# Altium PCB Leiterplatte.PcbDoc
Units mil, origin at the board's own origin, x right, y up, seen from the top; angles counter-clockwise.
Board outline 4527.56 x 2047.24 mil, 2 copper layers (Top Layer, Bottom Layer); 27 components, 26 nets, 174 pads, 445 vias.
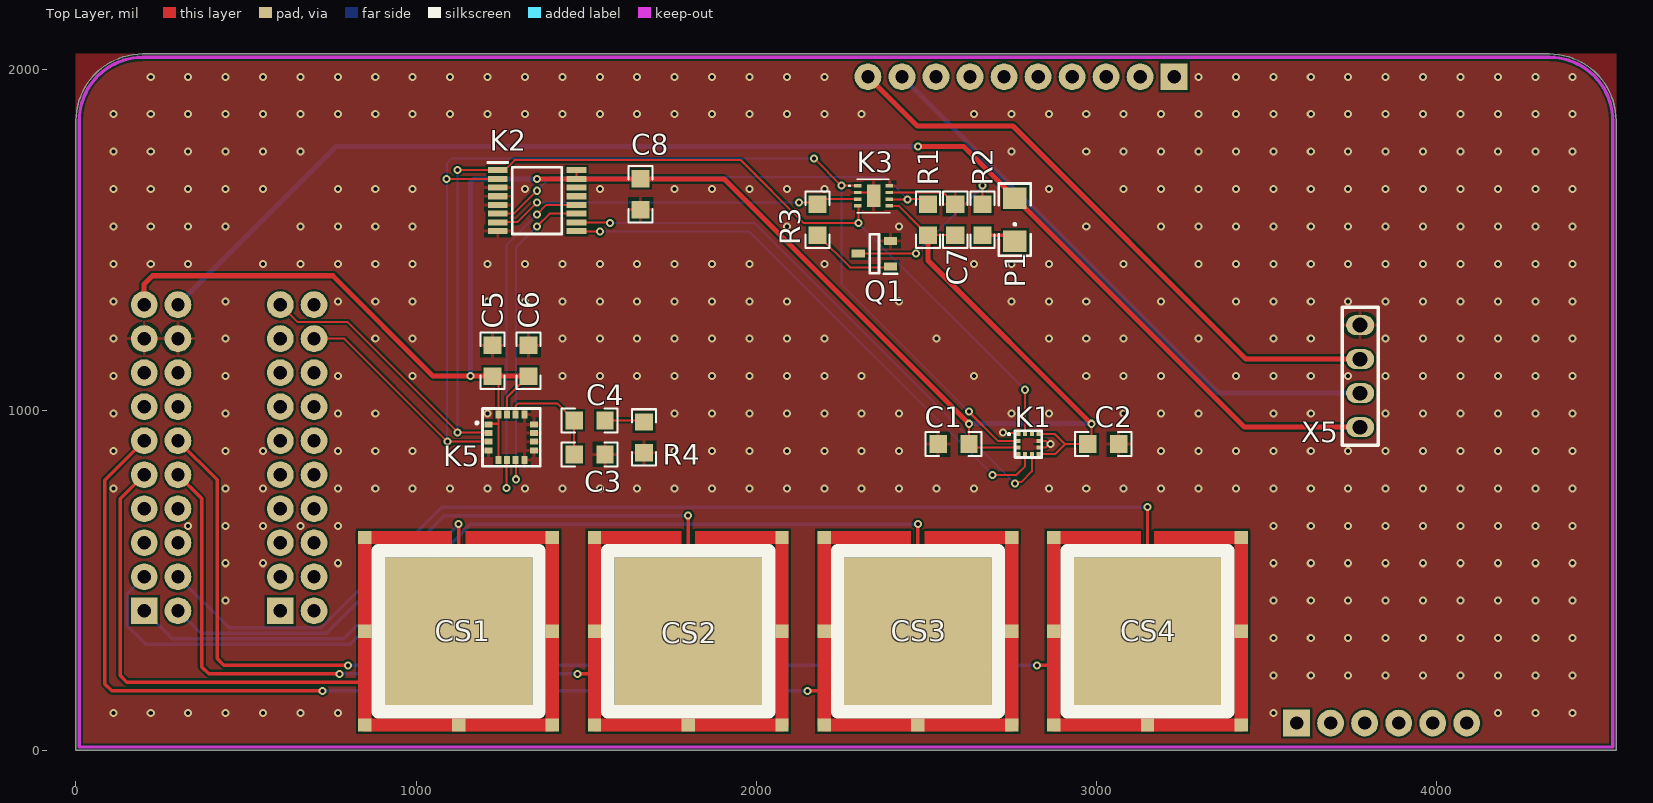
[diagram p0: Top Layer view]
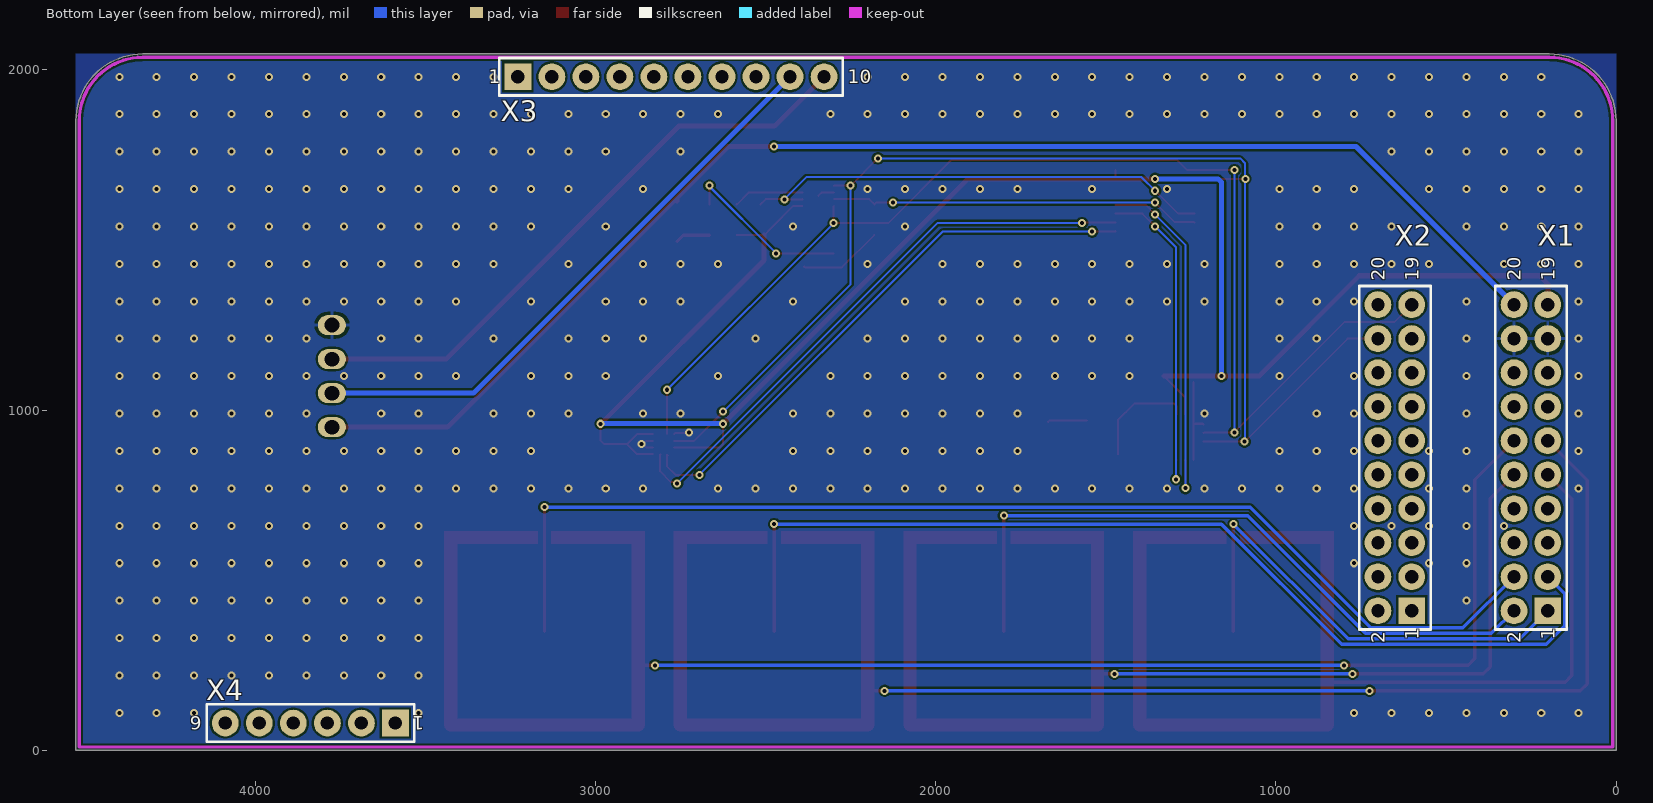
[diagram p1: Bottom Layer view, seen from below]

## Layer stack, top to bottom
Top Solder: solder mask 0.4, Solder Resist, Dk 3.5
Top Layer: signal copper 1.4
Dielectric 1: dielectric 12.6, FR-4, Dk 4.8
Bottom Layer: signal copper 1.4
Bottom Solder: solder mask 0.4, Solder Resist, Dk 3.5

## Board outline
0,0 0,1850.39 cw(c196.85,1850.39) 196.85,2047.24 4330.71,2047.24 cw(c4330.71,1850.39) 4527.56,1850.39 4527.56,0

## Design rules (kind name [scope] priority, off if disabled: settings)
AcuteAngle [All] p1: minimum=9.00000000000000E+0001 checktracksonly=TRUE
Clearance [All] p1: gap=6 ignorepadtopadclearanceinfootprint=TRUE
ComponentClearance [All] p1: gap=0 collisioncheckmode=3 verticalgap=0 showdistances=FALSE
HoleSize [All] p1: absolutevalues=TRUE maxlimit=100 minlimit=11.81 maxpercent=80.000 minpercent=20.000
MinimumAnnularRing [All] p1: minimumring=5.91
PlaneConnect [All] p1: planeconnectstyle=Direct reliefexpansion=20 reliefentries=4 reliefconductorwidth=10 reliefairgap=10
PolygonConnect [All] p1: thpad.connectstyle=Relief thpad.reliefconductorwidth=10 thpad.reliefentries=4 thpad.polygonreliefangle="90 Angle" thpad.airgapwidth=10 smdpad.connectstyle=Relief smdpad.reliefconductorwidth=10 smdpad.reliefentries=4 smdpad.polygonreliefangle="90 Angle" smdpad.airgapwidth=10 via.connectstyle=Direct via.reliefconductorwidth=10 via.reliefentries=4 via.polygonreliefangle="90 Angle" via.airgapwidth=10
RoomDefinition Schema [InComponentClass('Schema')] p1: confinementstyle=ConfineIn formatcopy=TRUE lockcomponents=FALSE outline 0,0 2000,0 2000,1000 0,1000
RoutingTopology [All] p1: topology=Daisy_MidDriven
RoutingVias [All] p1: holewidth=11.81 width=23.62 viastyle="Through Hole" minholewidth=11.81 minwidth=23.62 maxholewidth=11.81 maxwidth=23.62
SMDEntry [All] p1: side=TRUE corner=TRUE anyangle=TRUE
SilkToSolderMaskClearance [IsPad] p1: minsilkscreentomaskgap=7 clearancetoexposedcopper=TRUE
SolderMaskExpansion SolderMaskExpansion_1 [IsVia] p1: expansion=-393.7 istentingtop=FALSE
SolderMaskExpansion [All] p2: expansion=4 istentingtop=FALSE
UnRoutedNet [All] p1: checkbadconnections=TRUE
ViasUnderSMD [All] p1: allowed=FALSE
Width Power [InNetClass('Power')] p1: maxlimit=20 minlimit=6 preferedwidth=15
Width Signal [All] p2: maxlimit=15 minlimit=6 preferedwidth=10
24 further rules are at their usual default settings.

## Classes and differential pairs
net class Power: 3.3V 5V GND

## Components (designator, comment, footprint, x,y, rotation, side; value= is the part's Value field where it differs from the comment)
C1 "Capacitor" "CAP CER 0805 H" 2580,900 r0 top value=100nF
C2 "Capacitor" "CAP CER 0805 H" 3020,900 r0 top value=100nF
C3 "Capacitor" "CAP CER 0805 H" 1510,870 r0 top value=10nF
C4 "Capacitor" "CAP CER 0805 H" 1510,970 r0 top value=470nF
C5 "Capacitor" "CAP CER 0805 H" 1225,1145.28 r90 top value=100nF
C6 "Capacitor" "CAP CER 0805 H" 1330,1145.28 r90 top value=10uF
C7 "Capacitor" "CAP CER 0805 H" 2585,1560 r90 top value=100nF
C8 "Capacitor" "CAP CER 0805 H" 1660,1635 r90 top value=100nF
CS1 "Touch Button" "BUTTON SELF RECTANGLE" 1125,350 r0 top
CS2 "Touch Button" "BUTTON SELF RECTANGLE" 1800,350 r0 top
CS3 "Touch Button" "BUTTON SELF RECTANGLE" 2475,350 r0 top
CS4 "Touch Button" "BUTTON SELF RECTANGLE" 3150,350 r0 top
K1 "BMA423" BMA423 2800,900 r270 top
K2 "PCA9557PW,118" SOP65P640X110-16N 1355.67,1616.02 r0 top
K3 "SHT30-DIS-B2.5KS" SHT30DISB25KS 2345,1630 r0 top
K5 "I3G4250DTR" LGA-16L(4X4X1.1MM) 1280,920 r0 top
P1 "red ALERT" "LED 1206 red H" 2760,1560 r90 top
Q1 "MOSFET N-Channel" SOT96P237X111-3N 2347.24,1460 r180 top
R1 "Resistor" "RES 0805 H" 2505,1560 r270 top value=10k
R2 "Resistor" "RES 0805 H" 2665,1559.72 r270 top value=150
R3 "Resistor" "RES 0805 H" 2180,1560 r270 top value=100
R4 "Resistor" "RES 0805 H" 1670,920 r270 top value=10k
X1 "I/O Header" "Header THT male 2x10" 250,860.24 r90 bottom
X2 "FPGA Header" "Header THT male 2x10" 650,860.24 r90 bottom
X3 "Arduino IOH" "Header THT male 1x10" 2778.35,1980.24 r180 bottom locked
X4 "Arduino AD" "Header THT male 1x6" 3838.35,80.24 r0 bottom locked
X5 "HC-SR04" HC-SR04 3775,950 r90 top locked

## Footprints (in the part's own frame and the unit in brackets; to place one, negate y for a bottom-side part, rotate by r counter-clockwise, add the part's x,y. Pads: shape width x height; smd on the part's side, far side on the other; paste and mask are expansions set on the pad)
BMA423 [mm]
  rect 0.3x0.35 smd: 1(-0.75,-0.775) 2(-0.25,-0.775) 3(0.25,-0.775) 4(0.75,-0.775) 7(0.75,0.775) 8(0.25,0.775) 9(-0.25,0.775) 10(-0.75,0.775)
  rect 0.35x0.3 smd: 5(0.775,-0.25) 6(0.775,0.25) 11(-0.775,0.25) 12(-0.775,-0.25)
  silkscreen extent -1,-1.5 1,1, body extent -1,-1 1,1, height 1.1
"BUTTON SELF RECTANGLE" [mm]
  rect 1x1 smd paste-12 mask-12: DS(-7,-7) DS(-7,0) DS(-7,7) DS(0,-7) DS(7,-7) DS(7,0) DS(7,7)
  rect 11x11 smd paste-12 mask-12: y1(0,0)
  Top Layer region: 0.5,6.5 7.5,6.5 7.5,7.5 0.5,7.5
  Top Layer region: -7.5,6.5 -0.5,6.5 -0.5,7.5 -7.5,7.5
  Top Layer lines w1: -7,7 -7,0 -7,-3.81 -7,-7 0,-7 7,-7 7,0 7,7
  silkscreen extent -6,-6 6,6
"CAP CER 0805 H" [mm] "0805 ceramic capacitor for hand soldering"
  rect 1.3x1.35 smd: 1(-1.15,0) 2(1.15,0)
  silkscreen extent -2.1,-0.9 2.1,0.9, body extent -1,-0.62 1,0.63, height 0.8
HC-SR04 [mm]
  oval 1.5x2.1 hole 1.1: 1(0,0) 2(2.54,0) 3(5.08,0) 4(7.62,0)
  silkscreen extent -1.35,-1.35 8.95,1.33, body extent -19.07,-17.45 26.38,1.24, height 24.5
"Header THT male 1x6" [mm] "header for tht mounting / pitch = 2.54mm"
  rect 2x2 hole 1: 1(-6.35,0)
  round 2 hole 1: 2(-3.81,0) 3(-1.27,0) 4(1.27,0) 5(3.81,0) 6(6.35,0)
  silkscreen extent -7.75,-1.4 7.75,1.4, body extent -7.62,-1.24 7.62,1.25, height 8.54
"Header THT male 1x10" [mm] "header for tht mounting / pitch = 2.54mm"
  rect 2x2 hole 1: 1(-11.43,0)
  round 2 hole 1: 2(-8.89,0) 3(-6.35,0) 4(-3.81,0) 5(-1.27,0) 6(1.27,0) 7(3.81,0) 8(6.35,0) 9(8.89,0) 10(11.43,0)
  silkscreen extent -12.83,-1.4 12.83,1.4, body extent -12.7,-1.25 12.7,1.24, height 8.54
"Header THT male 2x10" [mm] "header for tht mounting / pitch = 2.54mm"
  rect 2x2 hole 1: 1(-11.43,-1.245)
  round 2 hole 1: 2(-11.43,1.27) 3(-8.89,-1.245) 4(-8.89,1.27) 5(-6.35,-1.245) 6(-6.35,1.27) 7(-3.81,-1.245) 8(-3.81,1.27) 9(-1.27,-1.245) 10(-1.27,1.27) 11(1.27,-1.245) 12(1.27,1.27) 13(3.81,-1.245) 14(3.81,1.27) 15(6.35,-1.245) 16(6.35,1.27) 17(8.89,-1.245) 18(8.89,1.27) 19(11.43,-1.245) 20(11.43,1.27)
  silkscreen extent -12.83,-2.67 12.83,2.67, body extent -12.7,-2.51 12.7,2.47, height 8.54
"LED 1206 red H" [mm] "SMD LED"
  rect 1.6x1.75 smd: A(1.6,0) C(-1.6,0)
  silkscreen extent -2.7,-1.2 2.7,1.2, body extent -1.6,-0.8 1.6,0.8, height 1.1
LGA-16L(4X4X1.1MM) [mm]
  rect 0.6x0.45 smd: 1(-1.7,0.975) 2(-1.7,0.325) 3(-1.7,-0.325) 4(-1.7,-0.975) 9(1.7,-0.975) 10(1.7,-0.325) 11(1.7,0.325) 12(1.7,0.975)
  rect 0.45x0.6 smd: 5(-0.975,-1.7) 6(-0.325,-1.7) 7(0.325,-1.7) 8(0.975,-1.7) 13(0.975,1.7) 14(0.325,1.7) 15(-0.325,1.7) 16(-0.975,1.7)
  silkscreen extent -2.66,-2.16 2.16,2.16
"RES 0805 H" [mm] "0805 resistor for hand soldering"
  rect 1.3x1.35 smd: 1(-1.15,0) 2(1.15,0)
  silkscreen extent -2.1,-0.9 2.1,0.9, body extent -1.15,-0.67 1.15,0.68, height 0.76
SHT30DISB25KS [mm]
  rect 0.55x0.25 smd: 1(-1.175,0.75) 2(-1.175,0.25) 3(-1.175,-0.25) 4(-1.175,-0.75) 5(1.175,-0.75) 6(1.175,-0.25) 7(1.175,0.25) 8(1.175,0.75)
  rect 1x1.7 smd: 9(0,0)
  silkscreen extent -1.85,-1.25 1.25,1.25, body extent -1.25,-1.25 1.25,1.25, height 1.1
SOP65P640X110-16N [mm]
  rect 1.475x0.45 smd: 1(-2.938,2.275) 2(-2.938,1.625) 3(-2.938,0.975) 4(-2.938,0.325) 5(-2.938,-0.325) 6(-2.938,-0.975) 7(-2.938,-1.625) 8(-2.938,-2.275) 9(2.938,-2.275) 10(2.938,-1.625) 11(2.938,-0.975) 12(2.938,-0.325) 13(2.938,0.325) 14(2.938,0.975) 15(2.938,1.625) 16(2.938,2.275)
  silkscreen extent -3.67,-2.5 1.85,2.85, body extent -3.2,-2.5 3.2,2.5, height 1.1
SOT96P237X111-3N [mm]
  rect 1x0.6 smd: 1(-1.2,0.955) 2(-1.2,-0.955) 3(1.2,0)
  silkscreen extent -1.7,-1.46 0.35,1.51, body extent -1.18,-1.46 1.18,1.46, height 1.11

## Part data
C1 C2 C3 C4 C5 C6 C7 C8: "Non polarized capacitor", LatestRevisionDate=01.04.2019, Publisher="ICT Berufsbildungscenter AG"
CS1 CS2 CS3 CS4: "Rechteckige Kupferfläche"
K1: library part Beschleunigungsmesser, "Beschleunigungsmesser Triaxial low-g 12bit Acceleration Sensor", Supplier Part Number 1=262-BMA423, ComponentLink1Description="New link", ComponentLink1URL=https://www.mouser.ch/ProductDetail/Bosch-Sensortec/BMA423/?qs=HXFqYaX1Q2xC%252BSgeGoX3mg%3D%3D, Supplier 1=Mouser
K2: library part "Port Expander", "Schnittstelle - I/O-Erweiterer OCT SMBUS/I2C INTRFC", Supplier Part Number 1=771-PCA9557PW-T, ComponentLink1Description="New link", ComponentLink1URL=https://www.mouser.ch/ProductDetail/NXP-Semiconductors/PCA9557PW118?qs=LOCUfHb8d9vFRJDeZaj93A%3D%3D, Supplier 1=Mouser
K3: library part "Humidity & Temp. Sensor", "Feuchtigkeitssensoren für Plattenmontage RH Accuracy +/- 3% Digital, DFN Type", Supplier Part Number 1=403-SHT30-DIS-B, ComponentLink1Description="New link", ComponentLink1URL=https://www.mouser.ch/ProductDetail/Sensirion/SHT30-DIS-B25kS?qs=y6ZabgHbY%252BwVK7712NFj8g==, Supplier 1=Mouser
K5: library part Gyroskop, "Gyroskope AUTO & INDUSTRIAL SENSORS", Supplier Part Number 1=511-I3G4250DTR, ComponentLink1Description="New link", ComponentLink1URL=https://www.mouser.ch/ProductDetail/STMicroelectronics/I3G4250DTR/?qs=%2Fha2pyFadugIiSRyLsysBNkcELyrugzinfnj1%2FprSe9QiJpXEwggKQ%3D%3D, Supplier 1=Mouser
P1: library part LED, "Light emitting diode", LatestRevisionDate=03.04.2019, Publisher="ICT Berufsbildungscenter AG"
X1 X2 X3 X4: "board to board header", LatestRevisionDate=02.05.2019, Publisher="ICT Berufsbildungscenter AG"
X5: library part Ultraschall-Distanzsensor, "Buchsenanschluss für den Sensor", Supplier Part Number 1=375-HC-SR04, ComponentLink1Description="New link", ComponentLink1URL=https://www.mouser.ch/ProductDetail/OSEPP-Electronics/HC-SR04/?qs=%2Fha2pyFaduh4%252Bb8VhcwOUSciFhLRlhNOu8G0etmXCiZdsBFkrSGdCA%3D%3D, Supplier 1=Mouser
R1 R2 R3 R4: LatestRevisionDate=02.04.2019, Publisher="ICT Berufsbildungscenter AG"

## Via types
v1: diameter 23.62, hole 11.81, Top Layer to Bottom Layer, 445 vias

## Nets (pads, with @x,y where several pads share a name; then routed paths per layer and width w, separated by ;. In a path a pad name is that pad's centre, name@x,y a point inside that pad or via, vN(x,y) a via of type N, cw(c..) or ccw(c..) an arc to the next point about the centre after c; other vN are vias at no path point)
3.3V: C1.2 C2.1 C5.1 C6.1 C7.1 C8.2 K1.3 K1.7 K1.10 K2.15 K2.16 K3.5 K5.1 K5.5 K5.15 K5.16 R1.2 X1.19 | length 5945.8
  Top Layer w6: K5.1 1214.69,960 1241.61,960 ; K5.5 1241.61,960 ; C5.1@1241.61,1083.39 K5.16 1241.61,960 ; K5.15 1267.2,1038.19 1329.02,1100 C6.1 ; K2.15 K2.16 ; K3.5 2418.27,1600.47 2481.43,1537.32 2504.02,1514.72 R1.2 C7.1 ; v1(2625,960) 2625,900.28 C1.2 2635.12,890.16 K1.3 ; K1.7 2878.11,870.47 2907.64,900 ; K1.10 2878.11,929.53 2907.64,900 ; v1(2985,960) 2985,910.28 C2.1 2907.64,900
  Top Layer w15: X1.19 200,1311.23 200,1370 225,1395 755,1395 1050,1100 v1(1160,1100) C5.1 C6.1@1329.02,1100 ; v1(1355,1680) K2.15 C8.2@1659.72,1680 ; C8.2 C8.2@1659.72,1680 ; R1.2 2505,1440 v1(2985,960) ; v1(2625,960) 1905,1680 C8.2@1659.72,1680
  Bottom Layer w15: v1(1160,1100) 1160,1670 1170,1680 v1(1355,1680) ; v1(2625,960) 2625.31,960.31 2984.69,960.31 v1(2985,960)
5V: P1.A X1.20 X5.1 | length 4011.6
  Top Layer w15: v1(2475,1775) 2610,1775 P1.A@2761,1624 ; P1.A@2760,1615 P1.A ; P1.A@2765,1620 3435,950 X5.1
  Bottom Layer w15: X1.20 764.76,1775 v1(2475,1775)
BMA_INT1: K1.5 K2.9 | length 1661.5
  Top Layer w6: K2.9 1472.07,1525.73 1539.27,1525.73 v1(1540,1525) ; v1(2695,810) 2765,810 2790.16,835.16 K1.5@2790.16,866.58 ; K1.5@2787.25,866.58 K1.5
  Bottom Layer w6: v1(1540,1525) 1980,1525 v1(2695,810)
BMA_INT2: K1.6 K2.10 | length 1720.4
  Top Layer w6: K2.10 1472.36,1551.02 1568.98,1551.02 v1(1570,1550) ; v1(2760,785) 2763.37,788.37 2778.37,788.37 2810,820 2810,869.33 K1.6
  Bottom Layer w6: v1(1570,1550) 1995,1550 v1(2760,785)
CS1: CS1.y1 X1.1 | length 1412.8
  Top Layer w10: CS1.y1 v1(1125,665)
  Bottom Layer w10: X1.1 283.36,327.87 787.87,327.87 v1(1125,665)
CS2: CS2.y1 X1.2 | length 2010.9
  Top Layer w10: CS2.y1 v1(1800,690)
  Bottom Layer w10: X1.2 366.37,343.87 736.61,343.87 1082.74,690 v1(1800,690)
CS3: CS3.y1 X1.3 | length 2973
  Top Layer w10: CS3.y1 v1(2475,665)
  Bottom Layer w10: X1.3 150.62,459.87 150.62,366.31 205.07,311.87 806.87,311.87 1160,665 v1(2475,665)
CS4: CS4.y1 X1.4 | length 3424.4
  Top Layer w10: CS4.y1 v1(3150,715)
  Bottom Layer w10: X1.4 450.37,359.87 720.86,359.87 1076,715 v1(3150,715)
DS1: CS1.DS X1.9 | length 1347.3
  Top Layer w10: X1.9 130,739.24 130,220 150,200 849.41,200
DS2: CS2.DS X1.10 | length 1756.9
  Top Layer w10: X1.10 370,740.24 370,245 390,225 v1(775,225) ; v1(1475,225) 1524.41,225
  Bottom Layer w10: v1(775,225) v1(1475,225)
DS3: CS3.DS X1.11 | length 2886
  Top Layer w10: X1.11 85,794.24 85,195 105,175 v1(725,175) ; v1(2150,175) 2199.41,175
  Bottom Layer w10: v1(725,175) v1(2150,175)
DS4: CS4.DS X1.12 | length 3155.6
  Top Layer w10: X1.12 415,795.24 415,270 435,250 v1(800,250) ; v1(2825,250) 2874.41,250
  Bottom Layer w10: v1(800,250) v1(2825,250)
GND: C1.1 C2.2 C3.2 C5.2 C6.2 C7.2 C8.1 K1.1 K1.8 K1.9 K2.3 K2.4 K2.5 K2.8 K3.2 K3.7 K3.8 K3.9 K5.4 K5.8 K5.9 K5.10 K5.11 K5.12 K5.13 Q1.2 R4.2 X1.17 X1.18 X5.4 | length 377.5
  Top Layer w6: K3.2 2335.16,1639.84 K3.9 ; K3.7 2474.67,1639.84 ; 2474.7,1639.87 2535.3,1639.87 ; 2535.33,1639.84 2549.45,1639.84 2584.02,1605.28 C7.2 ; v1(2725,935) 2727.74,932.26 2766.75,932.26 K1.1 ; K1.8 2850.39,890.16 v1@2860.23,900 ; K1.9 2850.39,909.84 v1@2860.23,900 ; v1(2865,900) v1@2860.23,900
  other v1: 110,110 220,110 330,110 440,110 550,110 660,110 770,110 3520,110 4180,110 4290,110 4400,110 3520,220 3630,220 3740,220 3850,220 3960,220 4070,220 4180,220 4290,220 4400,220 3520,330 3630,330 3740,330 3850,330 3960,330 4070,330 4180,330 4290,330 4400,330 440,440 3520,440 3630,440 3740,440 3850,440 3960,440 4070,440 4180,440 4290,440 4400,440 440,550 550,550 770,550 3520,550 3630,550 3740,550 3850,550 3960,550 4070,550 4180,550 4290,550 4400,550 330,660 440,660 550,660 660,660 770,660 3520,660 3630,660 3740,660 3850,660 3960,660 4070,660 4180,660 4290,660 4400,660 110,770 440,770 550,770 770,770 880,770 990,770 1100,770 1210,770 1320,770 1430,770 1540,770 1650,770 1760,770 1870,770 1980,770 2090,770 2200,770 2310,770 2420,770 2530,770 2640,770 2860,770 2970,770 3080,770 3190,770 3300,770 3410,770 3520,770 3630,770 3740,770 3850,770 3960,770 4070,770 4180,770 4290,770 4400,770 110,880 440,880 550,880 770,880 880,880 990,880 1760,880 1870,880 1980,880 2090,880 2200,880 2310,880 2420,880 3190,880 3300,880 3410,880 3520,880 3630,880 3740,880 3850,880 3960,880 4070,880 4180,880 4290,880 4400,880 110,990 440,990 770,990 880,990 1210,990 1760,990 1870,990 1980,990 2090,990 2200,990 2310,990 2420,990 2750,990 2860,990 3080,990 3190,990 3300,990 3520,990 3630,990 3850,990 3960,990 4070,990 4180,990 4290,990 4400,990 110,1100 440,1100 770,1100 990,1100 1430,1100 1540,1100 1650,1100 1760,1100 1870,1100 1980,1100 2090,1100 2200,1100 2310,1100 2640,1100 2970,1100 3080,1100 3190,1100 3410,1100 3520,1100 3630,1100 3740,1100 3850,1100 3960,1100 4070,1100 4180,1100 4290,1100 4400,1100 110,1210 440,1210 880,1210 990,1210 1430,1210 1540,1210 1650,1210 1760,1210 1870,1210 1980,1210 2090,1210 2200,1210 2530,1210 2860,1210 2970,1210 3080,1210 3300,1210 3520,1210 3630,1210 3850,1210 3960,1210 4070,1210 4180,1210 4290,1210 4400,1210 110,1320 440,1320 770,1320 880,1320 990,1320 1210,1320 1320,1320 1430,1320 1540,1320 1650,1320 1760,1320 1870,1320 1980,1320 2090,1320 2420,1320 2750,1320 2860,1320 2970,1320 3190,1320 3410,1320 3520,1320 3630,1320 3740,1320 3850,1320 3960,1320 4070,1320 4180,1320 4290,1320 4400,1320 110,1430 220,1430 330,1430 550,1430 660,1430 770,1430 880,1430 990,1430 1210,1430 1320,1430 1430,1430 1540,1430 1650,1430 1760,1430 1870,1430 1980,1430 2200,1430 2640,1430 2750,1430 2860,1430 3080,1430 3300,1430 3410,1430 3520,1430 3630,1430 3740,1430 3850,1430 3960,1430 4070,1430 4180,1430 4290,1430 4400,1430 110,1540 220,1540 330,1540 440,1540 660,1540 770,1540 880,1540 990,1540 2090,1540 2420,1540 2970,1540 3190,1540 3300,1540 3410,1540 3520,1540 3630,1540 3740,1540 3850,1540 3960,1540 4070,1540 4180,1540 4290,1540 4400,1540 110,1650 220,1650 330,1650 440,1650 550,1650 770,1650 880,1650 990,1650 1320,1650 1540,1650 1760,1650 1870,1650 1980,1650 2090,1650 2200,1650 2860,1650 3080,1650 3190,1650 3300,1650 3410,1650 3520,1650 3630,1650 3740,1650 3850,1650 3960,1650 4070,1650 4180,1650 4290,1650 4400,1650 110,1760 220,1760 330,1760 440,1760 550,1760 660,1760 2750,1760 2970,1760 3080,1760 3190,1760 3300,1760 3410,1760 3520,1760 3630,1760 3740,1760 3850,1760 3960,1760 4070,1760 4180,1760 4290,1760 4400,1760 110,1870 220,1870 330,1870 440,1870 550,1870 660,1870 770,1870 880,1870 990,1870 1100,1870 1210,1870 1320,1870 1430,1870 1540,1870 1650,1870 1760,1870 1870,1870 1980,1870 2090,1870 2200,1870 2310,1870 2640,1870 2750,1870 2860,1870 2970,1870 3080,1870 3190,1870 3300,1870 3410,1870 3520,1870 3630,1870 3740,1870 3850,1870 3960,1870 4070,1870 4180,1870 4290,1870 4400,1870 220,1980 330,1980 440,1980 550,1980 660,1980 770,1980 880,1980 990,1980 1100,1980 1210,1980 1320,1980 1430,1980 1540,1980 1650,1980 1760,1980 1870,1980 1980,1980 2090,1980 2200,1980 3300,1980 3410,1980 3520,1980 3630,1980 3740,1980 3850,1980 3960,1980 4070,1980 4180,1980 4290,1980 4400,1980
"GYRO INT1": K2.11 K5.7 | length 957.1
  Top Layer w6: K5.7 1293.14,852.72 v1(1293.14,796.86) ; v1(1355,1540) 1392.64,1577.64 K2.11
  Bottom Layer w6: v1(1293.14,796.86) 1293.14,1478.14 v1(1355,1540)
"GYRO INT2": K2.12 K5.6 | length 1051.2
  Top Layer w6: v1(1266.1,771.1) 1266.1,851.97 K5.6 ; v1(1355,1575) 1383.23,1603.23 K2.12
  Bottom Layer w6: v1(1266.1,771.1) 1266.1,1486.1 v1(1355,1575)
NetC3_1: C3.1 C4.1 K5.14 | length 322.1
  Top Layer w6: K5.14 1292.8,1012.8 1300,1020 1414.72,1020 1441.15,993.57 1442.13,993.57 1464.72,970.98 C4.1 C3.1
NetC4_2: C4.2 R4.1 | length 116.7
  Top Layer w6: C4.2 1665.28,970 R4.1
NetP1_C: P1.C R2.2 | length 102.2
  Top Layer w10: R2.2 2742.55,1514.45 P1.C
NetQ1_1: Q1.1 R3.2 | length 247.6
  Top Layer w6: R3.2 2180.98,1514.72 2275.91,1419.8 2384.64,1419.8 Q1.1@2387.24,1422.4
NetQ1_3: Q1.3 R2.1 | length 505.8
  Top Layer w6: Q1.3 v1(2470,1460) ; R2.1 v1(2665,1660)
  Bottom Layer w6: v1(2470,1460) 2470,1462.5 2665,1657.5 v1(2665,1660)
"Out PWM": X3.10 X5.3 | length 1790.5
  Top Layer w15: X3.10 2473.58,1835 2755,1835 3440,1150 X5.3
SCL: K1.12 K2.1 K3.4 K5.2 X2.19 | length 3679.6
  Top Layer w6: X2.19 652.62,1258.61 798.52,1258.61 v1(1122.12,935) 1123.22,933.9 1211.97,933.9 K5.2 ; v1(1121.86,1705.69) 1121.91,1705.64 K2.1 K2.1 1260.18,1705.59 1289.59,1735 1955,1735 2140,1550 v1(2300,1550) 2300,1599.21 K3.4 ; v1@2790.12,1059.88 2790.12,930.55 K1.12
  Bottom Layer w6: v1(1121.86,1705.69) 1121.99,1705.56 1121.99,935.13 v1(1122.12,935) ; v1(2300,1550) v1(2790,1060)
SDA: K1.2 K2.2 K3.1 K5.3 X2.18 | length 3856.1
  Top Layer w6: X2.18 789.17,1210.24 v1(1092.2,907.2) K5.3 ; v1(1090,1680) K2.2 ; v1(2170,1740) v1(2250,1660) 2250.24,1659.76 2298.5,1659.76 K3.1 ; v1(2625.4,995.4) 2625.4,994.6 2710.16,909.84 K1.2
  Bottom Layer w6: v1(1092.2,907.2) 1091.1,908.31 1091.1,1678.9 v1(1090,1680) 1090.81,1680.81 1090.81,1725.81 1105,1740 v1(2170,1740) ; v1(2250,1660) 2250,1370 2624.6,995.4 v1(2625.4,995.4)
"SHT30 ALERT": K2.7 K3.3 R3.1 | length 1090.9
  Top Layer w6: K2.7 1240.74,1552.79 1297.79,1552.79 v1(1355,1610) ; v1(2125.02,1609.98) 2175.3,1609.98 R3.1 2194.88,1620.16 K3.3
  Bottom Layer w6: v1(1355,1610) v1(2125.02,1609.98)
"SHT30 R\E\S\E\T\": K2.6 K3.6 R1.1 | length 1407.8
  Top Layer w6: K2.6 1287.64,1577.64 v1(1355,1645) ; K3.6 2391.82,1619.59 2444.44,1619.59 v1(2445,1619.03) ; v1@2445,1620.16 2500.12,1620.16 R1.1@2515,1605.28
  Bottom Layer w6: v1(1355,1645) 1395,1685 2380.16,1685 2445,1620.16 v1(2445,1619.03)
"Trig PWM": X3.9 X5.2 | length 1732
  Bottom Layer w15: X3.9 3358.58,1050 X5.2
pads on no net: K1.4 K1.11 K2.13 K2.14 X1.5 X1.6 X1.7 X1.8 X1.13 X1.14 X1.15 X1.16 X2.1 X2.2 X2.3 X2.4 X2.5 X2.6 X2.7 X2.8 X2.9 X2.10 X2.11 X2.12 X2.13 X2.14 X2.15 X2.16 X2.17 X2.20 X3.1 X3.2 X3.3 X3.4 X3.5 X3.6 X3.7 X3.8 X4.1 X4.2 X4.3 X4.4 X4.5 X4.6

## Polygon pours and split planes (outlines as drawn)
GND on Top Layer "NONET_L-01_P-001" (solid, pour order 0): 0,5 5,0 4527.56,0 4527.56,2047.24 0,2047.24
GND on Bottom Layer "NONET_L-01_P-001" (solid, pour order 1): 0,5 5,0 4527.56,0 4527.56,2047.24 0,2047.24

## Keep-outs
Keep-Out Layer:
  lines w10: 9.84,9.84 9.84,1850.39 cw(c196.85,1850.39) 196.85,2037.4 4330.71,2037.4 cw(c4330.71,1850.39) 4517.72,1850.39 4517.72,9.84 9.84,9.84

## Silkscreen, mask and mechanical layers (free items; w line width, h text height)
Mechanical 1:
  the board outline again, w9.84

## Text inside footprints (layer, text, board x,y; h text height)
X1: Bottom Overlay "2" at 280.31,315.24 h39.37 r270; Bottom Overlay "20" at 280.31,1380.24 h39.37 r270; Bottom Overlay "19" at 180.31,1380.24 h39.37 r270; Bottom Overlay "1" at 180.31,325.24 h39.37 r270
X2: Bottom Overlay "2" at 680.32,315.24 h39.37 r270; Bottom Overlay "20" at 680.32,1380.24 h39.37 r270; Bottom Overlay "19" at 580.32,1380.24 h39.37 r270; Bottom Overlay "1" at 580.32,325.24 h39.37 r270
X3: Bottom Overlay "10" at 2258.35,1960.55 h39.37; Bottom Overlay "1" at 3313.35,1960.55 h39.37
X4: Bottom Overlay "1" at 3503.35,99.92 h39.37 r180; Bottom Overlay "6" at 4158.35,99.92 h39.37 r180